# Altium PCB WCE_Camera_MCU.PcbDoc
Units mm, origin at the board's own origin, x right, y up, seen from the top; angles counter-clockwise.
Board outline 9.5 x 9.5 mm, 4 copper layers (Top Layer, GND, PWR, Bottom Layer); 19 components, 10 nets, 74 pads, 33 vias.
Unrouted connection lines stored in the file: 27.
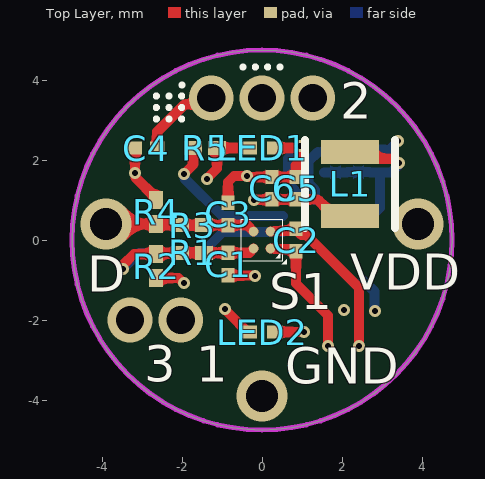
[diagram p0: Top Layer view]
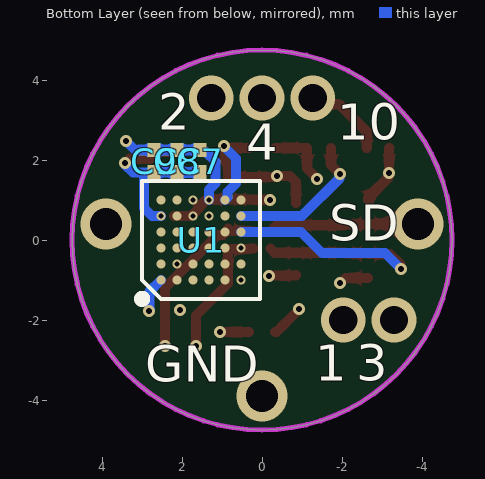
[diagram p1: Bottom Layer view, seen from below]
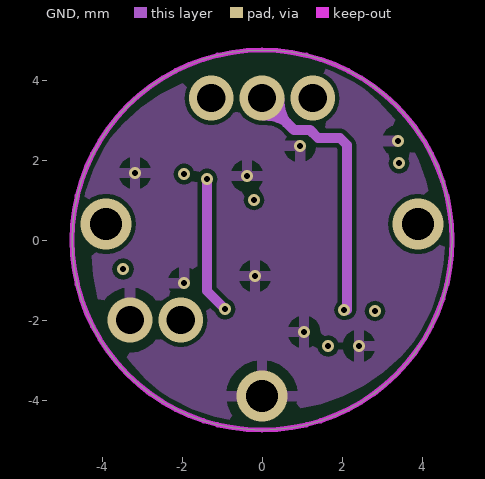
[diagram p2: GND]
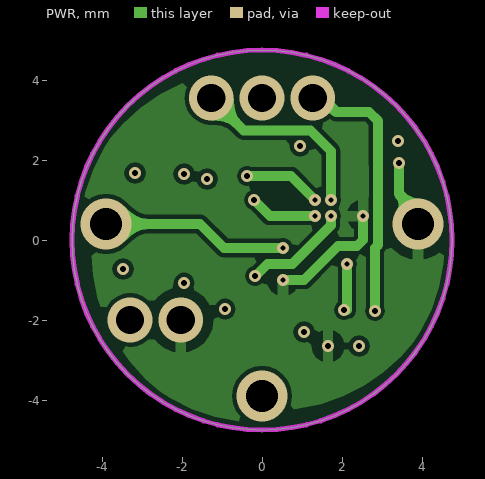
[diagram p3: PWR]
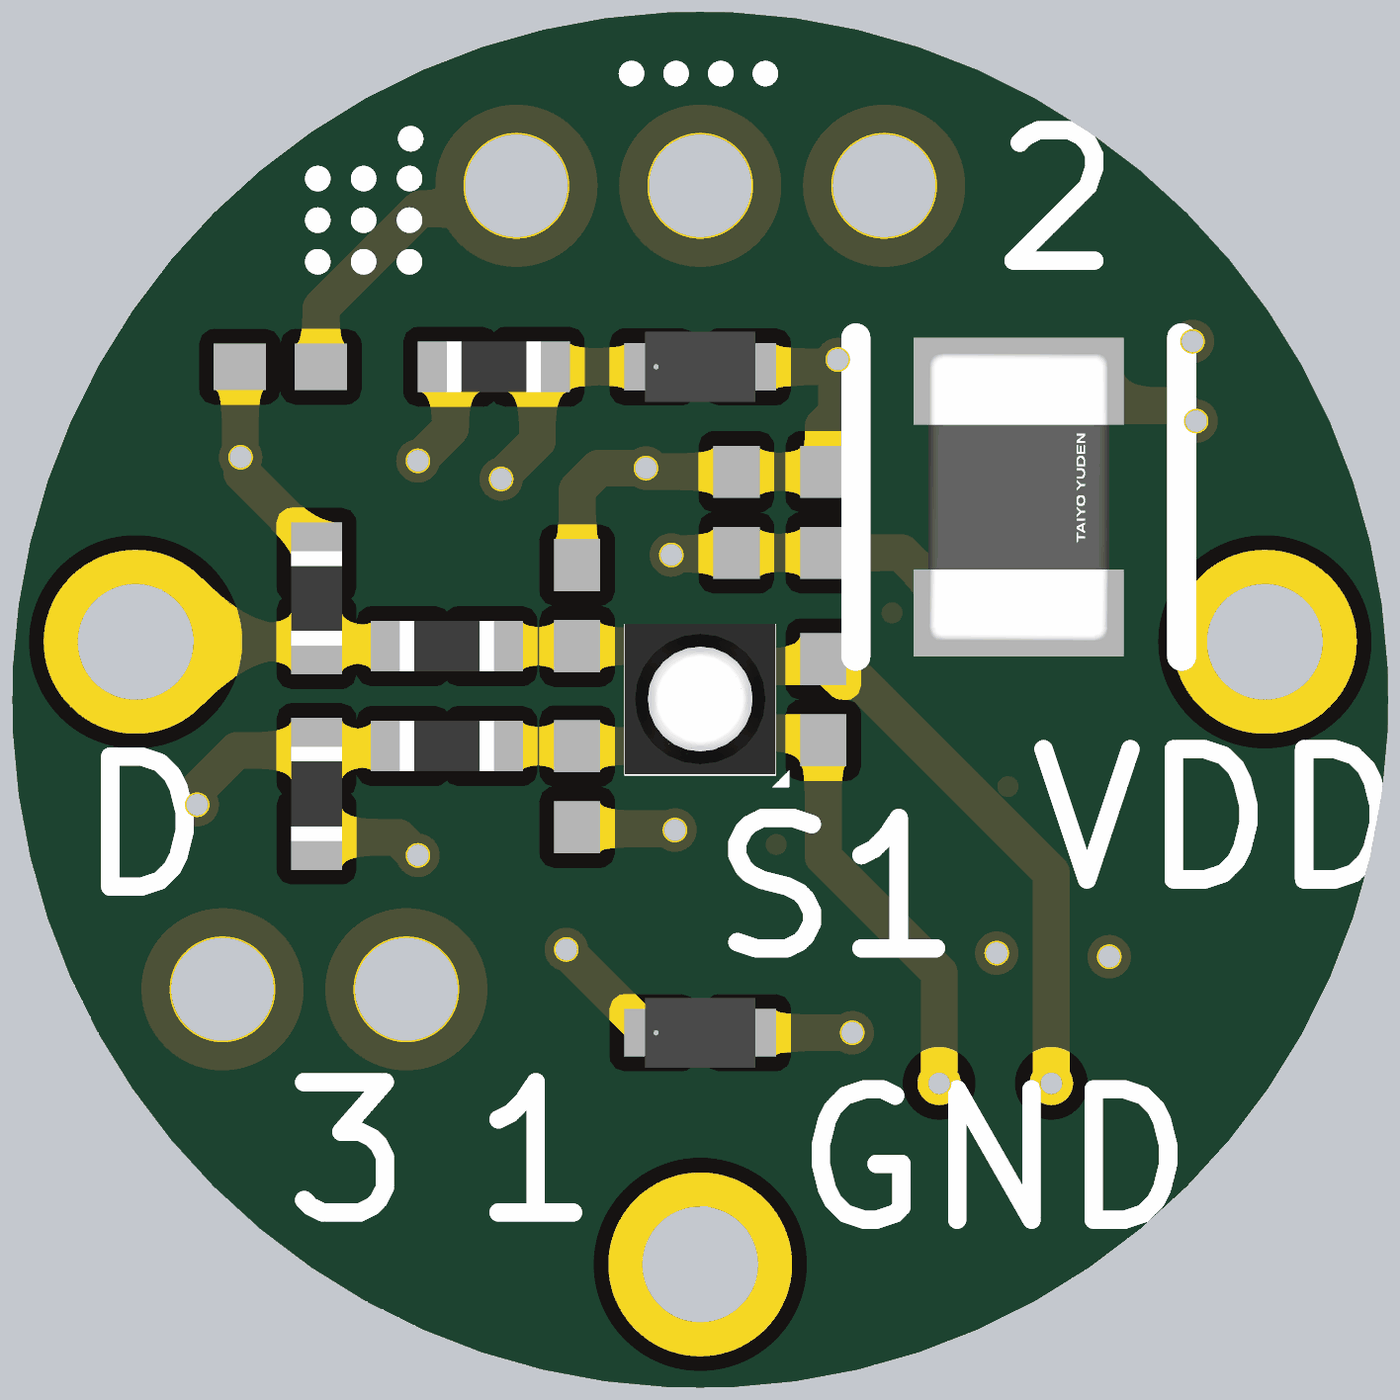
[diagram p4: 3D render of the assembled board from above, using the file's embedded part models]

## Layer stack, top to bottom
Top Solder: solder mask 0.0102, Solder Resist, Dk 3.5
Top Layer: signal copper 0.0356
Dielectric1: core 0.32, FR-4, Dk 4.8
GND: signal copper 0.0356
Dielectric2: prepreg 0.32, FR-4, Dk 4.8
PWR: signal copper 0.0356
Dielectric3: core 0.32, FR-4, Dk 4.8
Bottom Layer: signal copper 0.0356
Bottom Solder: solder mask 0.0102, Solder Resist, Dk 3.5

## Board outline
0,-4.75 cw(c0,0) -4.75,0 cw(c0,0) 0,4.75 cw(c0,0) 4.75,0 cw(c0,0)

## Design rules (kind name [scope] priority, off if disabled: settings)
Clearance Clearance_BGA [WithinRoom('BGA')] p1: gap=0.1 ignorepadtopadclearanceinfootprint=TRUE
Clearance [All] p2: gap=0.11 ignorepadtopadclearanceinfootprint=TRUE
ComponentClearance [All] p1: gap=0.15 collisioncheckmode=3 verticalgap=0.254 showdistances=FALSE
MinimumSolderMaskSliver MinimumSolderMaskSliver_5 [HasFootprint('SML-LX0201NWD-TR')] p1: minsoldermaskwidth=0.01
MinimumSolderMaskSliver MinimumSolderMaskSliver_4 [HasFootprint('RESC0603X28X15NL5T05')] p2: minsoldermaskwidth=0.01
MinimumSolderMaskSliver MinimumSolderMaskSliver_3 [HasFootprint('CAPC0603X33X15LL03T05')] p3: minsoldermaskwidth=0.01
MinimumSolderMaskSliver MinimumSolderMaskSliver_2 [HasFootprint('NanEyeC')] p4: minsoldermaskwidth=0.1
MinimumSolderMaskSliver MinimumSolderMaskSliver_1 [HasFootprint('STM32L051T8Y7DTR')] p5: minsoldermaskwidth=0.02
MinimumSolderMaskSliver [All] p6: minsoldermaskwidth=0.15
PolygonConnect [All] p1: connectstyle=Relief reliefconductorwidth=0.254 reliefentries=4 polygonreliefangle="90 Angle" airgapwidth=0.254
RoomDefinition BGA [InComponentClass('Room Definition 1')] p1: confinementstyle=ConfineIn formatcopy=TRUE lockcomponents=FALSE outline -0.6,-2.09 -0.6,1.89 3.65,1.89 3.65,-2.09
RoutingVias [All] p1: holewidth=0.15 width=0.3 viastyle="Through Hole" minholewidth=0.125 minwidth=0.225 maxholewidth=1 maxwidth=1.5
SilkToSilkClearance [All] p1: silktosilkclearance=0.15
SilkToSolderMaskClearance [IsPad] p1: minsilkscreentomaskgap=0.15 clearancetoexposedcopper=TRUE
SolderMaskExpansion [All] p1: expansion=0.102 istentingtop=FALSE
UnRoutedNet [All] p1: checkbadconnections=TRUE
Width [All] p1: maxlimit=0.254 minlimit=0.11 preferedwidth=0.254
25 further rules are at their usual default settings.

## Classes and differential pairs
component class "Room Definition 1": U1

## Components (designator, comment, footprint, x,y, rotation, side; value= is the part's Value field where it differs from the comment)
C1 "15pF" CAPC0603X33X15LL03T05 -0.85,-0.6 r90 top
C2 "470nF" CAPC0603X33X15LL03T05 0.85,0 r270 top
C3 "15pF" CAPC0603X33X15LL03T05 -0.85,0.65 r270 top
C4 "100nF" CAPC0603X33X15LL03T05 -2.9,2.3 r0 top
C5 "0.1uF" CAPC0603X33X15LL03T05 0.85,1.295 r270 top
C6 "100nF" CAPC0603X33X15LL03T05 0.25,1.295 r270 top
C7 "100nF" CAPC0603X33X15LL03T05 1.55,1.97 r270 bottom
C8 "100nF" CAPC0603X33X15LL03T05 2.125,1.97 r270 bottom
C9 "10uF" CAPC0603X33X15LL03T05 2.7,1.97 r270 bottom
L1 "CB2012T101K" FP-CB2012-MFG 2.2,1.4 r90 top
LED1 "SML-LX0201NWD-TR" SML-LX0201NWD-TR 0,2.3 r180 top
LED2 "SML-LX0201NWD-TR" SML-LX0201NWD-TR 0,-2.3 r180 top
R1 "24R" RESC0603X28X15NL5T05 -1.75,-0.32 r180 top
R2 "10k" RESC0603X28X15NL5T05 -2.65,-0.65 r90 top
R3 "24R" RESC0603X28X15NL5T05 -1.75,0.37 r180 top
R4 "10k" RESC0603X28X15NL5T05 -2.65,0.7 r270 top
R5 "125R" RESC0603X28X15NL5T05 -1.425,2.3 r0 top
S1 "NanEyeC" NanEyeC 0,0 r0 top
U1 "STM32L051T8Y7DTR" STM32L051T8Y7DTR 1.525,0 r90 bottom

## Footprints (in the part's own frame and the unit in brackets; to place one, negate y for a bottom-side part, rotate by r counter-clockwise, add the part's x,y. Pads: shape width x height; smd on the part's side, far side on the other; paste and mask are expansions set on the pad)
CAPC0603X33X15LL03T05 [mm] "Chip Capacitor, 2-Leads, Body 0.60x0.30mm, IPC High Density"
  rect 0.36x0.32 smd: 1(-0.28,0) 2(0.28,0)
  body extent -0.32,-0.17 0.32,0.17, height 0.33
FP-CB2012-MFG [mm]
  rect 0.6x1.45 smd paste+0 mask+0: 1(-0.8,0) 2(0.8,0)
  silkscreen extent -1.1,-1.12 1.1,1.12, body extent -1.2,-0.82 1.2,0.82, height 0.25
NanEyeC [mm]
  round 0.24 smd mask+0.05: A1(0.213,-0.212) B1(-0.212,-0.212) B2(-0.212,0.213)
  round 0.24 smd paste+0 mask+0.05: A2(0.213,0.213)
  silkscreen extent -0.52,-0.6 0.61,0.52, body extent -0.52,-0.52 0.52,0.53, height 2.17
RESC0603X28X15NL5T05 [mm] "Chip Resistor, 2-Leads, Body 0.65x0.35mm, IPC Medium Density"
  rect 0.45x0.35 smd: 1(-0.3,0) 2(0.3,0)
  body extent -0.33,-0.18 0.33,0.18, height 0.28
SML-LX0201NWD-TR [mm]
  rect 0.4x0.33 smd: 1(-0.325,0) 2(0.325,0)
  body extent -0.38,-0.24 0.38,0.24, height 0.46
STM32L051T8Y7DTR [mm]
  round 0.225 smd mask+0.05: A1(-1,1) A2(-0.6,1) A3(-0.2,1) A4(0.2,1) A5(0.6,1) A6(1,1) B1(-1,0.6) B2(-0.6,0.6) B3(-0.2,0.6) B4(0.2,0.6) B5(0.6,0.6) B6(1,0.6) C1(-1,0.2) C2(-0.6,0.2) C3(-0.2,0.2) C4(0.2,0.2) C5(0.6,0.2) C6(1,0.2) D1(-1,-0.2) D2(-0.6,-0.2) D3(-0.2,-0.2) D4(0.2,-0.2) D5(0.6,-0.2) D6(1,-0.2) E1(-1,-0.6) E2(-0.6,-0.6) E3(-0.2,-0.6) E4(0.2,-0.6) E5(0.6,-0.6) E6(1,-0.6) F1(-1,-1) F2(-0.6,-1) F3(-0.2,-1) F4(0.2,-1) F5(0.6,-1) F6(1,-1)
  silkscreen extent -1.57,-1.47 1.47,1.57, body extent -1.31,-1.44 1.31,1.44, height 0.59

## Part data
C1 C3: library part CMP-2010-00159-1, "Capacitor 15 pF 0201 XR5", Manufacturer="AVX Interconnect / Elco", Part Number=02016D104KAT2A
C2: library part CMP-2010-00159-1, "Capacitor 470 nF 0201 XR5", Manufacturer="AVX Interconnect / Elco", Part Number=02016D104KAT2A
C4 C6 C7 C8: library part CMP-2010-00159-1, "Capacitor 100 nF 0201 XR5", Manufacturer="AVX Interconnect / Elco", Part Number=02016D104KAT2A
C5: library part CMP-2010-00159-1, "Capacitor 0.1 uF 0201 XR5", Manufacturer="AVX Interconnect / Elco", Part Number=02016D104KAT2A
C9: library part CMP-2010-00159-1, "Capacitor 10 uF 0201 XR5", Manufacturer="AVX Interconnect / Elco", Part Number=02016D104KAT2A
L1: library part CMP-14484-000220-1, "SMD Inductors 100uH ±10% 0.13A 9.1Ω 0805", Case Code (Imperial)=0805, Case Code (Metric)=2012, Current Rating=130mA, DC Resistance (DCR)=9.1R, Inductance=100uH, Inductance Tolerance=10%, Max Operating Temperature=105°C, Min Operating Temperature=-40°C, Package Quantity=3000, Resistor Type=Wirewound, Saturation Current=60mA, Self Resonant Frequency=8MHz, Test Frequency=796kHz, Case/Package=0805, Core Material=Ferrite, Depth=1.45mm, Halogen Free="Halogen Free", Height=0.9mm, Height - Seated (Max)=0.057inch, Lead Free="Lead Free", Length=0.079inch, Max DC Current=130mA, Mount="Surface Mount", Number of Pins=2, Packaging="Tape and Reel", Radiation Hardening=No, RoHS Compliant=Yes, Series=CB, Shielding=Unshielded, Termination=SMD/SMT, Tolerance=10%, Width=0.049inch
LED1 LED2: "Lumex LED 0201 SML-LX0201NWD-TR"
R1 R2 R3 R4 R5: library part CMP-2004-00001-2, "Thin film Resistor 125 OHM 0.1%-1% 100 mW (1/10 W) 0201", Case Code (Imperial)=0201, Case Code (Metric)=0603, Max Operating Temperature="155 degC", Min Operating Temperature="-55 degC", Package Quantity=1, Power Rating="50 mW", Resistance="0 mohm", Tolerance=5%, Voltage Rating="30 V", Case\Package=0201, ComponentLink1Description="Manufacturer URL", ComponentLink1URL=http://www.vishay.com/, ComponentLink2Description=Datasheet, ComponentLink2URL=http://www.vishay.com/docs/20052/crcw0201e3.pdf, DatasheetVersion=03/2016, Height="0.23 mm", Length="0.6 mm", Mount="Surface Mount", Mounting Technology="Surface Mount", PackageDescription="2-Pin Surface Mount Device, Body 0.6 x 0.3 mm", PackageReference=0201, Packaging="Cut Tape", Radiation Hardening=No, REACH SVHC=Unknown, RoHSCompliant=true, Weight="6E-06 oz", Width="0.3 mm"
S1: "Camera module NanEyeC from AMS. The Part will be delivered by us"
U1: "STM microcontroller STM32L051T8Y7DTR WLCSP36"

## Via types
v1: diameter 0.3, hole 0.15, Top Layer to Bottom Layer, 17 vias
v2: diameter 0.3/0.225 (per signal layer), hole 0.125, PWR to Bottom Layer, 8 vias
v3: diameter 1.12, hole 0.71, Top Layer to Bottom Layer, 5 vias
v4: diameter 1.27, hole 0.8, Top Layer to Bottom Layer, 3 vias

## Nets (pads, with @x,y where several pads share a name; then routed paths per layer and width w, separated by ;. In a path a pad name is that pad's centre, name@x,y a point inside that pad or via, vN(x,y) a via of type N, cw(c..) or ccw(c..) an arc to the next point about the centre after c; other vN are vias at no path point)
GND: C1.1 C2.1 C3.1 C4.1 C5.1 C6.1 C7.1 C8.1 C9.1 LED1.1 LED2.1 R2.1 R4.1 S1.A2 U1.C5 U1.D6 U1.E6 | length 21.2
  Top Layer w0.254: C4.1 -3.177,2.298 -3.177,1.677 -3.166,1.666 -3.166,1.566 -2.65,1.05 R4.1 ; R2.1 -2.087,-0.95 -1.962,-1.075 v1(-1.95,-1.075) ; C1.1 -0.839,-0.891 -0.184,-0.891 v1(-0.175,-0.9) ; C3.1 -0.85,1.451 -0.701,1.6 -0.363,1.6 -0.338,1.575 C6.1 C5.1 0.85,1.89 0.941,1.981 0.941,2.341 v1(0.95,2.35) 0.938,2.35 0.888,2.3 LED1.1 ; S1.A2 0.295,0.213 0.309,0.227 0.817,0.227 C2.1@0.85,0.26 ; LED2.1 v1(1.05,-2.3) ; C2.1 C2.1@0.85,0.26 ; v1(2.425,-2.65) 2.425,-1.195 1.237,-0.007 1.104,0.127 0.983,0.127 C2.1@0.85,0.26
  PWR w0.254: v1(-0.375,1.6) 0.725,1.6 v2(1.325,1) ; v1(-0.175,-0.9) -0.163,-0.9 0.137,-0.6 0.754,-0.6 1.223,-0.131 1.725,0.371 v2(1.725,0.6)
  Bottom Layer w0.254: U1.E6 0.865,1.061 0.865,1.2 0.65,1.414 0.65,1.89 0.65,2.038 0.95,2.338 v1(0.95,2.35) ; v2(1.325,1) 1.325,1.254 1.163,1.416 1.163,1.964 C7.1@1.396,2.197 ; C7.1 C8.1 C9.1 3.175,2.25 v1(3.4,2.475)
  other v1: -3.175,1.675
  other v3: -3.3,-2
  other v4: 0,-3.9
LED: R5.1 U1.F5 | length 3.7
  Top Layer w0.254: v1(-1.95,1.65) -1.725,1.875 R5.1
  Bottom Layer w0.254: v1(-1.95,1.65) -1.941,1.641 -1.941,1.544 -0.997,0.6 U1.F5
NetLED1_2: LED1.2 LED2.2 R5.2 | length 6
  Top Layer w0.254: v1(-1.375,1.525) -1.375,1.537 -1.125,1.787 R5.2 LED1.2 ; v1(-0.925,-1.725) -0.925,-1.735 -0.6,-2.06 -0.57,-2.09 -0.36,-2.3 LED2.2
  GND w0.254: v1(-1.375,1.525) -1.375,-1.275 v1(-0.925,-1.725)
NRST: C4.2 U1.C6 | length 6.9
  Top Layer w0.254: C4.2 -2.62,2.705 -1.934,3.391 -1.429,3.391 v3(-1.27,3.55)
  PWR w0.254: v3(-1.27,3.55) -0.457,2.737 1.213,2.737 1.725,2.225 v2(1.725,1)
SPI_CLK: C1.2 R1.1 R1.2 R2.2 S1.B1 U1.F4 | length 7.9
  Top Layer w0.254: v1(-3.475,-0.725) -3.466,-0.716 -3.466,-0.616 -3.2,-0.35 -2.698,-0.35 R2.2 -2.635,-0.335 -2.065,-0.335 R1.2 R1.1 C1.2 -0.32,-0.32 S1.B1
  Bottom Layer w0.254: v1(-3.475,-0.725) -3.075,-0.325 -1.5,-0.325 -0.975,0.2 U1.F4
SPI_DATA: C3.2 R3.1 R3.2 R4.2 S1.B2 U1.F3 | length 8.4
  Top Layer w0.254: v4(-3.9,0.4) R4.2 -2.635,0.385 -2.065,0.385 R3.2 R3.1 C3.2 -0.37,0.37 S1.B2
  PWR w0.254: v4(-3.9,0.4) -1.55,0.4 -0.95,-0.2 v2(0.525,-0.2)
SWCLK: U1.B2 | length 8
  GND w0.254: v3(0,3.55) 0.797,2.753 1.197,2.753 1.4,2.55 1.95,2.55 2.125,2.375 2.125,-1.75 v1(2.048,-1.75)
  PWR w0.254: v1(2.048,-1.75) 2.125,-1.75 v2(2.125,-0.6)
SWDIO: U1.A1 | length 7.6
  PWR w0.254: v3(1.27,3.55) 1.504,3.55 1.854,3.2 2.676,3.2 2.902,2.974 2.902,1.89 2.902,-0.124 2.825,-0.201 v1(2.825,-1.775)
  Bottom Layer w0.254: U1.A1 2.816,-1.291 2.816,-1.766 v1(2.825,-1.775)
VDD: C2.2 C7.2 C8.2 C9.2 L1.2 S1.A1 U1.A5 U1.F1 | length 12.8
  Top Layer w0.254: S1.A1 0.295,-0.212 0.309,-0.227 0.817,-0.227 0.85,-0.26 C2.2 0.85,-1.085 1.65,-1.885 v1(1.65,-2.65) ; L1.2 2.63,2.2 2.798,2.032 3.306,2.032 3.413,1.925 v1(3.425,1.925)
  PWR w0.254: v2(0.525,-1) 1.05,-1 1.9,-0.15 2.375,-0.15 2.525,0 v2(2.525,0.6) ; v1(3.425,1.925) 3.425,1.15 3.9,0.675 v4(3.9,0.4)
  Bottom Layer w0.254: C7.2@1.555,1.685 C7.2 C8.2 ; C8.2@2.135,1.7 2.69,1.7 C9.2 2.95,1.69 ; v2(2.525,0.6) 2.75,0.6 2.95,0.8 2.95,1.69 ; v1(3.425,1.925) 3.416,1.916 3.416,1.882 3.225,1.69 2.95,1.69
  other v3: -2.03,-2
VDDA: C5.2 C6.2 L1.1 U1.D5 | length 4.3
  Top Layer w0.254: v1(-0.2,1) -0.192,1.008 0.242,1.008 C6.2 C5.2 1.391,1.015 1.602,0.804 1.602,0.773 1.775,0.6 L1.1
  PWR w0.254: v1(-0.2,1) 0.2,0.6 v2(1.325,0.6)
pads on no net: U1.A2 U1.A3 U1.A4 U1.A6 U1.B1 U1.B3 U1.B4 U1.B5 U1.B6 U1.C1 U1.C2 U1.C3 U1.C4 U1.D1 U1.D2 U1.D3 U1.D4 U1.E1 U1.E2 U1.E3 U1.E4 U1.E5 U1.F2 U1.F6

## Polygon pours and split planes (outlines as drawn)
GND on GND "GND_L02_P000" (solid, pour order 0): 0,-4.75 cw(c0.25,-0.25) -4.75,0 cw(c-0.25,-0.25) 0,4.75 cw(c-0.25,0.25) 4.75,0 cw(c0.25,0.25)
VDD on PWR "VDD_L03_P001" (solid, pour order 1): 0,-4.75 cw(c0.25,-0.25) -4.75,0 cw(c-0.25,-0.25) 0,4.75 cw(c-0.25,0.25) 4.75,0 cw(c0.25,0.25)

## Keep-outs
Keep-Out Layer:
  the board outline again, w0.127

## Silkscreen, mask and mechanical layers (free items; w line width, h text height)
Top Overlay:
  circle w0.127: c-2.642,3.6 r0.025
  circle w0.127: c-2.325,3.6 r0.025
  circle w0.127: c-2.008,3.6 r0.025
  circle w0.127: c-2,3.875 r0.025
  circle w0.127: c-2.008,3.025 r0.025
  circle w0.127: c-2.325,3.025 r0.025
  circle w0.127: c-2.642,3.025 r0.025
  circle w0.127: c-2.008,3.313 r0.025
  circle w0.127: c-2.325,3.313 r0.025
  circle w0.127: c-2.642,3.313 r0.025
  circle w0.127: c0.142,4.325 r0.025
  circle w0.127: c0.45,4.325 r0.025
  circle w0.127: c-0.167,4.325 r0.025
  circle w0.127: c-0.475,4.325 r0.025
  text "2" at 1.952,3.027 h0.9
  text "VDD" at 2.202,-1.248 h0.9
  text "D" at -4.373,-1.298 h0.9
  text "3" at -2.948,-3.548 h0.9
  text "1" at -1.648,-3.548 h0.9
  text "GND" at 0.577,-3.598 h0.9
Bottom Overlay:
  text "2" at 2.598,2.752 h0.9
  text "10" at -1.877,2.502 h0.9
  text "4" at 0.398,2.002 h0.9
  text "SD" at -1.677,-0.023 h0.9
  text "3" at -2.352,-3.523 h0.9
  text "1" at -1.327,-3.523 h0.9
  text "GND" at 2.923,-3.548 h0.9